# Altium PCB 175-00066revA - PCB, Sinistro Camera Controller Pass-Thru.PcbDoc
Units mm, origin at the board's own origin, x right, y up, seen from the top; angles counter-clockwise.
Board outline 114 x 114 mm, 2 copper layers (Top Layer, Bottom Layer), stack 0.325 mm thick; 62 components, 62 nets, 142 pads, 0 vias.
Unrouted connection lines stored in the file: 62.
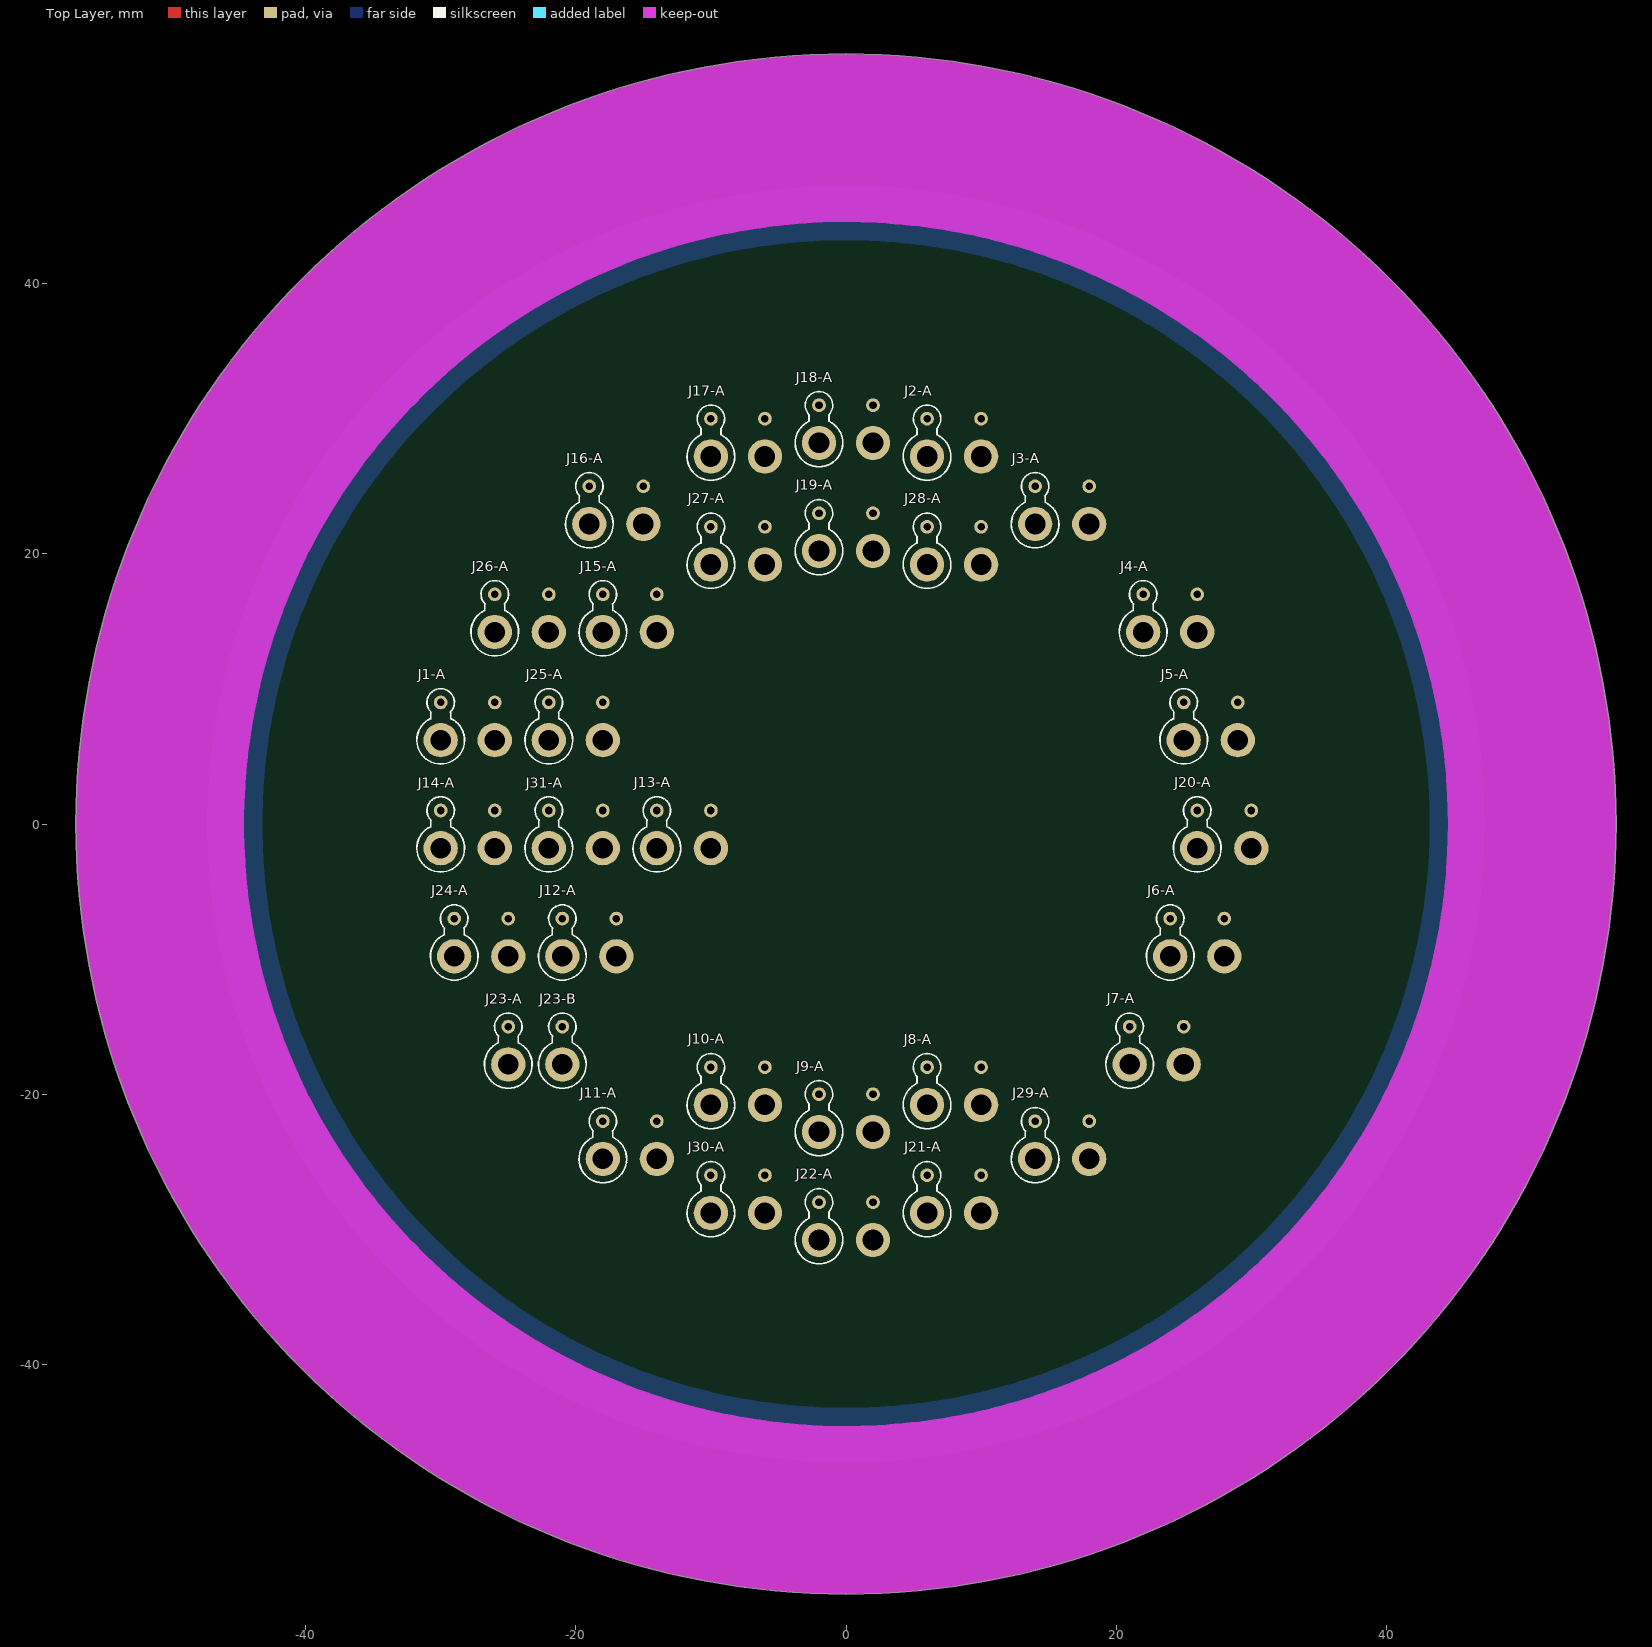
[diagram p0: Top Layer view]
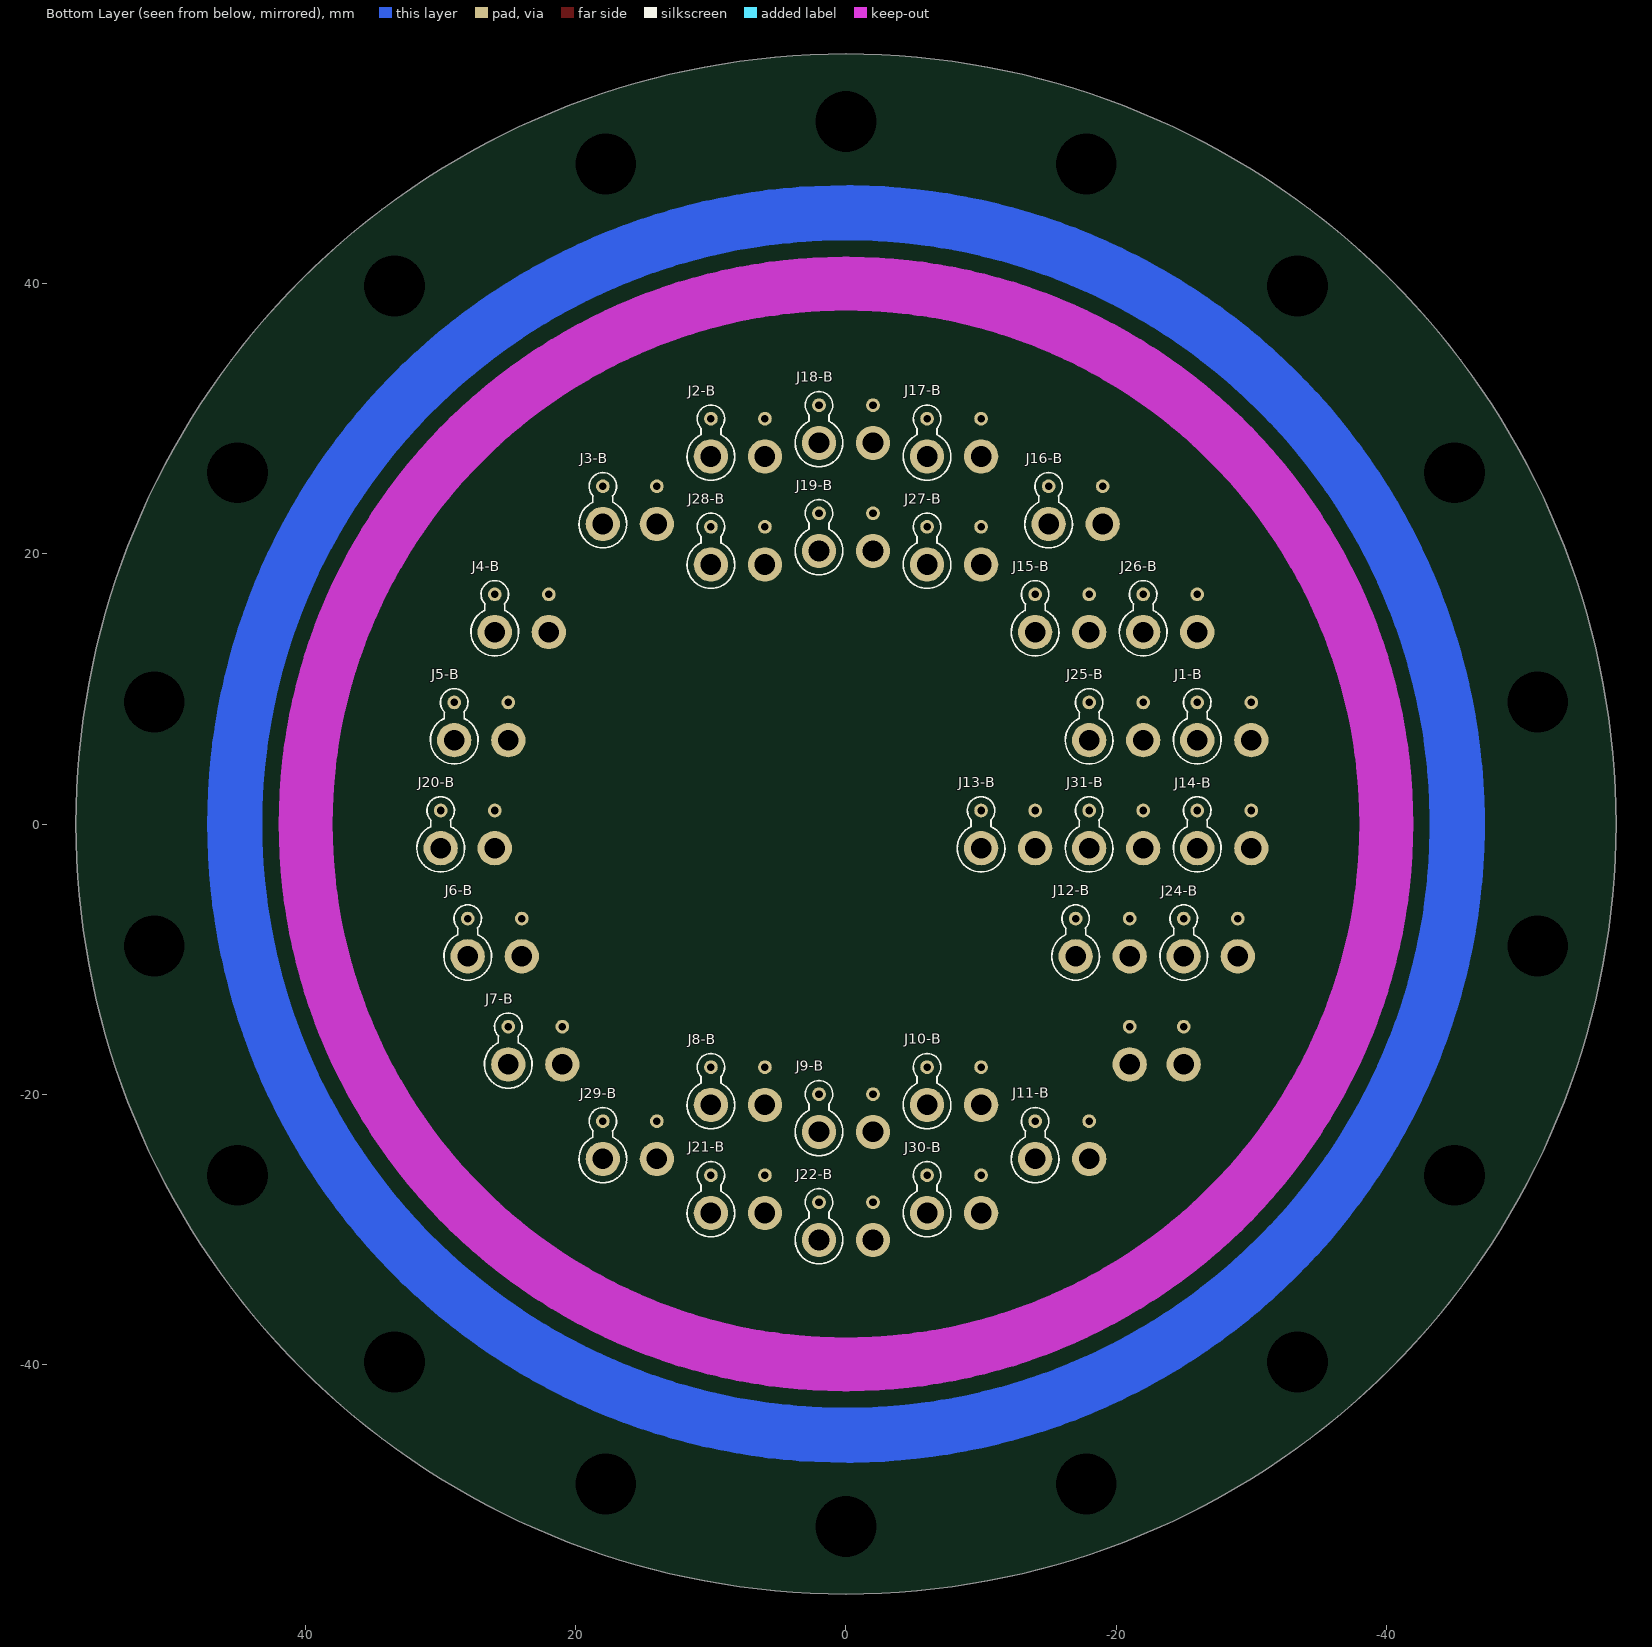
[diagram p1: Bottom Layer view, seen from below]

## Layer stack, top to bottom
Top Solder: solder mask 0.0102, Solder Resist, Dk 3.5
Top Layer: signal copper 0.0356
Dielectric 1: core 0.254, FR-4, Dk 4.2
Bottom Layer: signal copper 0.0356
Bottom Solder: solder mask 0.0102, Solder Resist, Dk 3.5

## Board outline
-57,0 ccw(c0,0) 0,-57 ccw(c0,0) 57,0 ccw(c0,0) 0,57 ccw(c0,0)

## Design rules (kind name [scope] priority, off if disabled: settings)
Clearance [All] p1: gap=0.254
PolygonConnect [All] p1: connectstyle=Relief reliefconductorwidth=0.254 reliefentries=4 polygonreliefangle="90 Angle" airgapwidth=0.254
RoutingVias [All] p1: holewidth=0.711 width=1.27 viastyle="Through Hole" minholewidth=0.711 minwidth=1.27 maxholewidth=0.711 maxwidth=1.27
SolderMaskExpansion [All] p1: expansion=0.102
Width [All] p1: maxlimit=0.254 minlimit=0.254 preferedwidth=0.254
30 further rules are at their usual default settings.

## Components (designator, comment, footprint, x,y, rotation, side; value= is the part's Value field where it differs from the comment)
J1-A "RG-178_CoaxTermination" RG-178_TERMINATION -30,9 r90 top
J1-B "RG-178_CoaxTermination" RG-178_TERMINATION -26,9 r90 bottom
J2-A "RG-178_CoaxTermination" RG-178_TERMINATION 6,30 r90 top
J2-B "RG-178_CoaxTermination" RG-178_TERMINATION 10,30 r90 bottom
J3-A "RG-178_CoaxTermination" RG-178_TERMINATION 14,25 r90 top
J3-B "RG-178_CoaxTermination" RG-178_TERMINATION 18,25 r90 bottom
J4-A "RG-178_CoaxTermination" RG-178_TERMINATION 22,17 r90 top
J4-B "RG-178_CoaxTermination" RG-178_TERMINATION 26,17 r90 bottom
J5-A "RG-178_CoaxTermination" RG-178_TERMINATION 25,9 r90 top
J5-B "RG-178_CoaxTermination" RG-178_TERMINATION 29,9 r90 bottom
J6-A "RG-178_CoaxTermination" RG-178_TERMINATION 24,-7 r90 top
J6-B "RG-178_CoaxTermination" RG-178_TERMINATION 28,-7 r90 bottom
J7-A "RG-178_CoaxTermination" RG-178_TERMINATION 21,-15 r90 top
J7-B "RG-178_CoaxTermination" RG-178_TERMINATION 25,-15 r90 bottom
J8-A "RG-178_CoaxTermination" RG-178_TERMINATION 6,-18 r90 top
J8-B "RG-178_CoaxTermination" RG-178_TERMINATION 10,-18 r90 bottom
J9-A "RG-178_CoaxTermination" RG-178_TERMINATION -2,-20 r90 top
J9-B "RG-178_CoaxTermination" RG-178_TERMINATION 2,-20 r90 bottom
J10-A "RG-178_CoaxTermination" RG-178_TERMINATION -10,-18 r90 top
J10-B "RG-178_CoaxTermination" RG-178_TERMINATION -6,-18 r90 bottom
J11-A "RG-178_CoaxTermination" RG-178_TERMINATION -18,-22 r90 top
J11-B "RG-178_CoaxTermination" RG-178_TERMINATION -14,-22 r90 bottom
J12-A "RG-178_CoaxTermination" RG-178_TERMINATION -21,-7 r90 top
J12-B "RG-178_CoaxTermination" RG-178_TERMINATION -17,-7 r90 bottom
J13-A "RG-178_CoaxTermination" RG-178_TERMINATION -14,1 r90 top
J13-B "RG-178_CoaxTermination" RG-178_TERMINATION -10,1 r90 bottom
J14-A "RG-178_CoaxTermination" RG-178_TERMINATION -30,1 r90 top
J14-B "RG-178_CoaxTermination" RG-178_TERMINATION -26,1 r90 bottom
J15-A "RG-178_CoaxTermination" RG-178_TERMINATION -18,17 r90 top
J15-B "RG-178_CoaxTermination" RG-178_TERMINATION -14,17 r90 bottom
J16-A "RG-178_CoaxTermination" RG-178_TERMINATION -19,25 r90 top
J16-B "RG-178_CoaxTermination" RG-178_TERMINATION -15,25 r90 bottom
J17-A "RG-178_CoaxTermination" RG-178_TERMINATION -10,30 r90 top
J17-B "RG-178_CoaxTermination" RG-178_TERMINATION -6,30 r90 bottom
J18-A "RG-178_CoaxTermination" RG-178_TERMINATION -2,31 r90 top
J18-B "RG-178_CoaxTermination" RG-178_TERMINATION 2,31 r90 bottom
J19-A "RG-178_CoaxTermination" RG-178_TERMINATION -2,23 r90 top
J19-B "RG-178_CoaxTermination" RG-178_TERMINATION 2,23 r90 bottom
J20-A "RG-178_CoaxTermination" RG-178_TERMINATION 26,1 r90 top
J20-B "RG-178_CoaxTermination" RG-178_TERMINATION 30,1 r90 bottom
J21-A "RG-178_CoaxTermination" RG-178_TERMINATION 6,-26 r90 top
J21-B "RG-178_CoaxTermination" RG-178_TERMINATION 10,-26 r90 bottom
J22-A "RG-178_CoaxTermination" RG-178_TERMINATION -2,-28 r90 top
J22-B "RG-178_CoaxTermination" RG-178_TERMINATION 2,-28 r90 bottom
J23-A "RG-178_CoaxTermination" RG-178_TERMINATION -25,-15 r90 top
J23-B "RG-178_CoaxTermination" RG-178_TERMINATION -21,-15 r90 top
J24-A "RG-178_CoaxTermination" RG-178_TERMINATION -29,-7 r90 top
J24-B "RG-178_CoaxTermination" RG-178_TERMINATION -25,-7 r90 bottom
J25-A "RG-178_CoaxTermination" RG-178_TERMINATION -22,9 r90 top
J25-B "RG-178_CoaxTermination" RG-178_TERMINATION -18,9 r90 bottom
J26-A "RG-178_CoaxTermination" RG-178_TERMINATION -26,17 r90 top
J26-B "RG-178_CoaxTermination" RG-178_TERMINATION -22,17 r90 bottom
J27-A "RG-178_CoaxTermination" RG-178_TERMINATION -10,22 r90 top
J27-B "RG-178_CoaxTermination" RG-178_TERMINATION -6,22 r90 bottom
J28-A "RG-178_CoaxTermination" RG-178_TERMINATION 6,22 r90 top
J28-B "RG-178_CoaxTermination" RG-178_TERMINATION 10,22 r90 bottom
J29-A "RG-178_CoaxTermination" RG-178_TERMINATION 14,-22 r90 top
J29-B "RG-178_CoaxTermination" RG-178_TERMINATION 18,-22 r90 bottom
J30-A "RG-178_CoaxTermination" RG-178_TERMINATION -10,-26 r90 top
J30-B "RG-178_CoaxTermination" RG-178_TERMINATION -6,-26 r90 bottom
J31-A "RG-178_CoaxTermination" RG-178_TERMINATION -22,1 r90 top
J31-B "RG-178_CoaxTermination" RG-178_TERMINATION -18,1 r90 bottom

## Footprints (in the part's own frame and the unit in brackets; to place one, negate y for a bottom-side part, rotate by r counter-clockwise, add the part's x,y. Pads: shape width x height; smd on the part's side, far side on the other; paste and mask are expansions set on the pad)
RG-178_TERMINATION [mil] "RG-178 Solder Termination in a PCB"
  round 40 hole 22: 1(0,0)
  round 100 hole 60: GND(-110,0)
  silkscreen extent -179,-69 40,69

## Free pads (board coordinates)
  round 1 hole 4.5 unplated: 0(-51.21,-9.03) 0(-51.21,9.03) 0(-45.033,-26) 0(-45.033,26) 0(-33.425,39.834) 0(-33.425,-39.834) 0(-17.785,-48.864) 0(-17.785,48.864) 0(0,-52) 0(0,52) 0(17.785,-48.864) 0(17.785,48.864) 0(33.425,-39.834) 0(33.425,39.834) 0(45.033,-26) 0(45.033,26) 0(51.21,-9.03) 0(51.21,9.03)

## Nets (pads, with @x,y where several pads share a name; then routed paths per layer and width w, separated by ;. In a path a pad name is that pad's centre, name@x,y a point inside that pad or via, vN(x,y) a via of type N, cw(c..) or ccw(c..) an arc to the next point about the centre after c; other vN are vias at no path point)
NetJ1-A_1: J1-A.1 J1-B.1
NetJ1-A_GND: J1-A.GND J1-B.GND
NetJ2-A_1: J2-A.1 J2-B.1
NetJ2-A_GND: J2-A.GND J2-B.GND
NetJ3-A_1: J3-A.1 J3-B.1
NetJ3-A_GND: J3-A.GND J3-B.GND
NetJ4-A_1: J4-A.1 J4-B.1
NetJ4-A_GND: J4-A.GND J4-B.GND
NetJ5-A_1: J5-A.1 J5-B.1
NetJ5-A_GND: J5-A.GND J5-B.GND
NetJ6-A_1: J6-A.1 J6-B.1
NetJ6-A_GND: J6-A.GND J6-B.GND
NetJ7-A_1: J7-A.1 J7-B.1
NetJ7-A_GND: J7-A.GND J7-B.GND
NetJ8-A_1: J8-A.1 J8-B.1
NetJ8-A_GND: J8-A.GND J8-B.GND
NetJ9-A_1: J9-A.1 J9-B.1
NetJ9-A_GND: J9-A.GND J9-B.GND
NetJ10-A_1: J10-A.1 J10-B.1
NetJ10-A_GND: J10-A.GND J10-B.GND
NetJ11-A_1: J11-A.1 J11-B.1
NetJ11-A_GND: J11-A.GND J11-B.GND
NetJ12-A_1: J12-A.1 J12-B.1
NetJ12-A_GND: J12-A.GND J12-B.GND
NetJ13-A_1: J13-A.1 J13-B.1
NetJ13-A_GND: J13-A.GND J13-B.GND
NetJ14-A_1: J14-A.1 J14-B.1
NetJ14-A_GND: J14-A.GND J14-B.GND
NetJ15-A_1: J15-A.1 J15-B.1
NetJ15-A_GND: J15-A.GND J15-B.GND
NetJ16-A_1: J16-A.1 J16-B.1
NetJ16-A_GND: J16-A.GND J16-B.GND
NetJ17-A_1: J17-A.1 J17-B.1
NetJ17-A_GND: J17-A.GND J17-B.GND
NetJ18-A_1: J18-A.1 J18-B.1
NetJ18-A_GND: J18-A.GND J18-B.GND
NetJ19-A_1: J19-A.1 J19-B.1
NetJ19-A_GND: J19-A.GND J19-B.GND
NetJ20-A_1: J20-A.1 J20-B.1
NetJ20-A_GND: J20-A.GND J20-B.GND
NetJ21-A_1: J21-A.1 J21-B.1
NetJ21-A_GND: J21-A.GND J21-B.GND
NetJ22-A_1: J22-A.1 J22-B.1
NetJ22-A_GND: J22-A.GND J22-B.GND
NetJ23-A_1: J23-A.1 J23-B.1
NetJ23-A_GND: J23-A.GND J23-B.GND
NetJ24-A_1: J24-A.1 J24-B.1
NetJ24-A_GND: J24-A.GND J24-B.GND
NetJ25-A_1: J25-A.1 J25-B.1
NetJ25-A_GND: J25-A.GND J25-B.GND
NetJ26-A_1: J26-A.1 J26-B.1
NetJ26-A_GND: J26-A.GND J26-B.GND
NetJ27-A_1: J27-A.1 J27-B.1
NetJ27-A_GND: J27-A.GND J27-B.GND
NetJ28-A_1: J28-A.1 J28-B.1
NetJ28-A_GND: J28-A.GND J28-B.GND
NetJ29-A_1: J29-A.1 J29-B.1
NetJ29-A_GND: J29-A.GND J29-B.GND
NetJ30-A_1: J30-A.1 J30-B.1
NetJ30-A_GND: J30-A.GND J30-B.GND
NetJ31-A_1: J31-A.1 J31-B.1
NetJ31-A_GND: J31-A.GND J31-B.GND
copper on no net: | length 284.3
  Bottom Layer w4.09: 45.245,0 ccw(c0,0) 45.245,0

## Keep-outs
Top Layer:
  circle w12.446: c0,0 r50.777
Bottom Layer:
  circle w4: c0,0 r40

## Silkscreen, mask and mechanical layers (free items; w line width, h text height)
Top Overlay:
  text "NRES Hermetic Board B / Revision 1" at 73.66,-19.939 h1.52 r90
Bottom Solder:
  circle w4.09: c0,0 r45.245
Mechanical 1:
  circle w0.254: c0,0 r57
Mechanical 2:
  lines w0.254: 12.056,-162.929 ccw(c13.326,-162.929) 13.326,-164.199 21.708,-164.199 ccw(c21.708,-163.183) 22.724,-163.183 22.724,-158.865 ccw(c21.708,-158.865) 21.708,-157.849 12.056,-157.849 12.056,-162.929 ; 12.056,-155.563 ccw(c13.326,-155.563) 13.326,-156.833 112.386,-156.833 ccw(c112.386,-155.563) 113.656,-155.563 113.656,-150.737 ccw(c112.386,-150.737) 112.386,-149.467 12.056,-149.467 12.056,-155.563 ; 12.056,-147.181 ccw(c13.326,-147.181) 13.326,-148.451 61.078,-148.451 ccw(c61.078,-147.181) 62.348,-147.181 62.348,-143.371 ccw(c61.078,-143.371) 61.078,-142.101 12.056,-142.101 12.056,-147.181 ; 12.056,-140.069 ccw(c13.072,-140.069) 13.072,-141.085 33.646,-141.085 ccw(c33.646,-139.815) 34.916,-139.815 34.916,-136.005 ccw(c33.646,-136.005) 33.646,-134.735 12.056,-134.735 12.056,-140.069 ; 23.74,-163.183 ccw(c24.756,-163.183) 24.756,-164.199 74.54,-164.199 ccw(c74.54,-163.183) 75.556,-163.183 75.556,-158.865 ccw(c74.54,-158.865) 74.54,-157.849 23.74,-157.849 23.74,-163.183 ; 35.932,-139.815 ccw(c37.202,-139.815) 37.202,-141.085 61.078,-141.085 ccw(c61.078,-139.815) 62.348,-139.815 62.348,-136.005 ccw(c61.078,-136.005) 61.078,-134.735 35.932,-134.735 35.932,-139.815 ; 63.364,-147.181 ccw(c64.634,-147.181) 64.634,-148.451 112.386,-148.451 ccw(c112.386,-147.181) 113.656,-147.181 113.656,-143.371 ccw(c112.386,-143.371) 112.386,-142.101 63.364,-142.101 63.364,-147.181 ; 63.364,-139.815 ccw(c64.634,-139.815) 64.634,-141.085 88.51,-141.085 ccw(c88.51,-139.815) 89.78,-139.815 89.78,-136.005 ccw(c88.51,-136.005) 88.51,-134.735 63.364,-134.735 63.364,-139.815 ; 76.572,-162.929 ccw(c77.842,-162.929) 77.842,-164.199 86.224,-164.199 ccw(c86.224,-163.183) 87.24,-163.183 87.24,-158.865 ccw(c86.224,-158.865) 86.224,-157.849 76.572,-157.849 76.572,-162.929 ; 88.256,-163.183 ccw(c89.272,-163.183) 89.272,-164.199 112.386,-164.199 ccw(c112.386,-162.929) 113.656,-162.929 113.656,-159.119 ccw(c112.386,-159.119) 112.386,-157.849 88.256,-157.849 88.256,-163.183 ; 90.796,-139.815 ccw(c92.066,-139.815) 92.066,-141.085 112.386,-141.085 ccw(c112.386,-139.815) 113.656,-139.815 113.656,-136.005 ccw(c112.386,-136.005) 112.386,-134.735 90.796,-134.735 90.796,-139.815
  lines w0.762: -291.217,-148.832 -173.615,-148.832 -173.615,-165.469 ; 10.943,-165.215 cw(c13.326,-162.929) 10.024,-162.929 10.024,-120.511 cw(c13.326,-120.511) 13.326,-117.209 112.386,-117.209 cw(c112.386,-120.511) 114.638,-118.096 ; -291.217,-165.469 115.183,-165.469 115.183,101.231 -291.217,101.231 -291.217,-165.469 ; 11.04,-162.929 ccw(c13.326,-162.929) 13.326,-165.215 112.386,-165.215 ccw(c112.386,-162.929) 114.672,-162.929 114.672,-120.511 ccw(c112.386,-120.511) 112.386,-118.225 13.326,-118.225 ccw(c13.326,-120.511) 11.04,-120.511 11.04,-162.929
  lines w1.27: 15.739,-130.951 57.649,-130.951 ; 15.739,-121.299 57.649,-121.299 ; 57.649,-130.951 15.485,-130.951 15.485,-121.299 57.649,-121.299 ; 57.649,-130.951 57.649,-121.299
  text "Dimensions in mils" at 58.547,29.337 h5.08
  text "FABRICATION NOTES /  /   GENERAL /     1) Manufactuered in accordance with IPC-6012B Class 1 /     2) Number of layers: 2 /     3) Finished thickness: 0.062 /     4) Base material: FR4 /     5) Plating: Gold immersion /     6) Solder mask color: Black /  /   EXCEPTIONS /     7) Silkscreen on top only /     8) Minimum dielectric thickness is 0.031 in /     9) All drill hole sizes and tolerances apply after plating /    10) All plated holes and surfaces gold immersion plated to preserve /        solderability /  /   ROUTING TOLERANCES /    12) X.XX  = +/- 0.02 in /    13) X.XXX = +/- 0.005 in /  /   LAYER STACK /     *.GTL - 1 Oz. Cu (finished) TOP LAYER GERBER DATA /     *.GBL - 1 Oz. Cu (finished) BOTTOM LAYER GERBER DATA /     *.GTS - TOP LAYER SOLDERMASK /     *.GBS - BOTTOM LAYER SOLDERMASK /     *.GTO - TOP LAYER (ONLY) SILKSCREEN /     *.GD1 - DRILL DRAWING /     *.GM1 - BOARD OUTLINE /     *.GM2 - BOARD DRAWING AND NOTES" at -286.01,-1.512 h1.91
  text "Las Cumbres Observatory" at 17.009,-124.855 h3.81
  text "Global Telescope Network" at 21.073,-128.919 h3.17
  text "LCOGT / 6740 Cortona Dr., Ste. 102 / Goleta, CA 93117 / www.lcogt.net" at 67.558,-131.116 h1.52
  text "DATE" at 12.564,-136.051 h0.81
  text "DESIGNED" at 36.44,-136.051 h0.81
  text "DRAWN" at 63.872,-136.051 h0.81
  text "SCALE" at 91.304,-136.051 h0.81
  text "J. De Vera" at 71.619,-138.571 h1.4
  text ".Print_Date" at 16.758,-138.698 h1.4
  text "J. De Vera" at 43.044,-138.698 h1.4
  text "1 : 1" at 98.543,-139.053 h2.29
  text "CHECKED/DATE" at 12.564,-143.417 h0.81
  text "APPROVED/DATE" at 63.872,-143.417 h0.81
  text "TITLE" at 12.564,-150.783 h0.81
  text "175-00065-B   Sinistro Camera Controller Extension" at 15.488,-154.611 h2.54
  text "SIZE" at 12.564,-159.165 h0.81
  text "DOC NO." at 24.248,-159.165 h0.81
  text "REV" at 77.08,-159.165 h0.81
  text "SHEET" at 88.764,-159.165 h0.81
  text "OF" at 99.686,-161.786 h1.52
  text "1" at 95.368,-162.294 h2.54
  text "1" at 105.528,-162.294 h2.54
  text "B" at 80.763,-162.625 h3.3
  text "-" at 38.345,-162.675 h3.3
  text "GPT" at 56.626,-163.051 h3.3
  text "B" at 15.993,-163.082 h2.54
  text "NOTICE: / This drawing embodies a proprietary design owned by Las Cumbres Observatory / Global Telescope Network, Inc. It is submitted for a specific purpose under a / confidential relationship, and except for purposes expressly granted in / writing, all rights are reserved by Las Cumbres Observatory." at -289.185,-164.072 h1.52
Mechanical 8:
  circle w0.254: c0,0 r33
  circle w0.254: c17.785,48.864 r2.25
  circle w0.254: c0,0 r40
  circle w0.254: c0,0 r47.29
  circle w0.254: c0,0 r43.2
  circle w0.254: c0,0 r47.29
  circle w0.254: c0,0 r47.29
  circle w0.254: c0,0 r47.29
  circle w0.254: c45.033,26 r2.25
  circle w0.254: c51.21,-9.03 r2.25
  circle w0.254: c33.425,-39.834 r2.25
  circle w0.254: c0,-52 r2.25
  circle w0.254: c-33.425,-39.834 r2.25
  circle w0.254: c-51.21,-9.03 r2.25
  circle w0.254: c-45.033,26 r2.25
  circle w0.254: c-17.785,48.864 r2.25
  circle w0.254: c0,52 r4.5
  circle w0.254: c-33.425,39.834 r2.25
  circle w0.254: c-51.21,9.03 r2.25
  circle w0.254: c-45.033,-26 r2.25
  circle w0.254: c-17.785,-48.864 r2.25
  circle w0.254: c17.785,-48.864 r2.25
  circle w0.254: c45.033,-26 r2.25
  circle w0.254: c51.21,9.03 r2.25
  circle w0.254: c33.425,39.834 r2.25
  circle w0.254: c0,0 r43.2
  circle w0.254: c45.033,26 r2.25
  circle w0.254: c51.21,-9.03 r2.25
  circle w0.254: c33.425,-39.834 r2.25
  circle w0.254: c0,-52 r2.25
  circle w0.254: c-33.425,-39.834 r2.25
  circle w0.254: c-51.21,-9.03 r2.25
  circle w0.254: c-45.033,26 r2.25
  circle w0.254: c-17.785,48.864 r2.25
  circle w0.254: c0,52 r2.25
  circle w0.254: c-33.425,39.834 r2.25
  circle w0.254: c-51.21,9.03 r2.25
  circle w0.254: c-45.033,-26 r2.25
  circle w0.254: c-17.785,-48.864 r2.25
  circle w0.254: c17.785,-48.864 r2.25
  circle w0.254: c45.033,-26 r2.25
  circle w0.254: c51.21,9.03 r2.25
  circle w0.254: c33.425,39.834 r2.25
  text "Top layer faces inside of chamber / Bottom layer faces Pass-Thru hole" at -26.543,61.214 h1.52
  text "Gasket" at -4.699,44.45 h1.52
  text "Pass-Thru Perimeter" at -13.716,35.56 h1.52